# Altium PCB DP_UART.PcbDoc
Units mil, origin at the board's own origin, x right, y up, seen from the top; angles counter-clockwise.
Board outline 1285 x 620 mil, 2 copper layers (Top Layer, Bottom Layer); 14 components, 15 nets, 55 pads, 0 vias.
Unrouted connection lines stored in the file: 28.
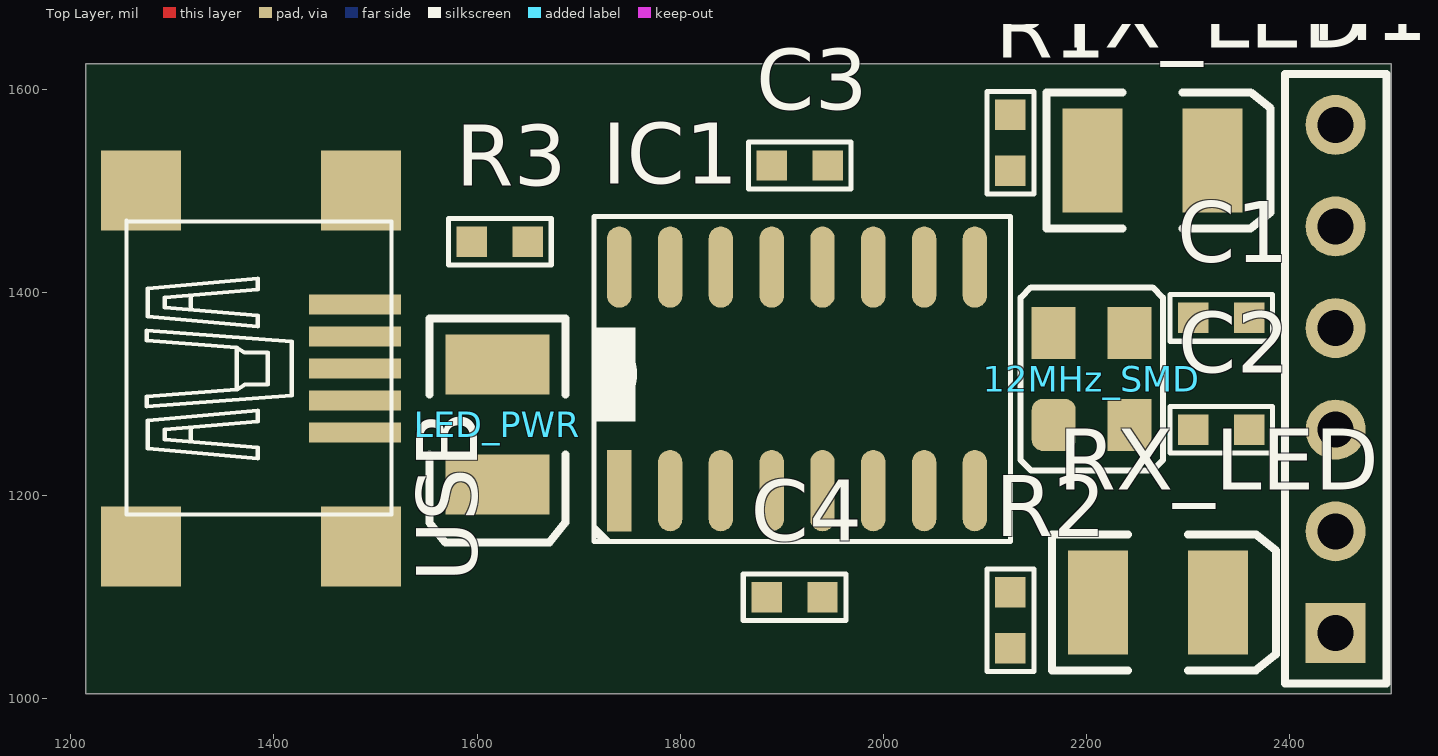
[diagram p0: Top Layer view]
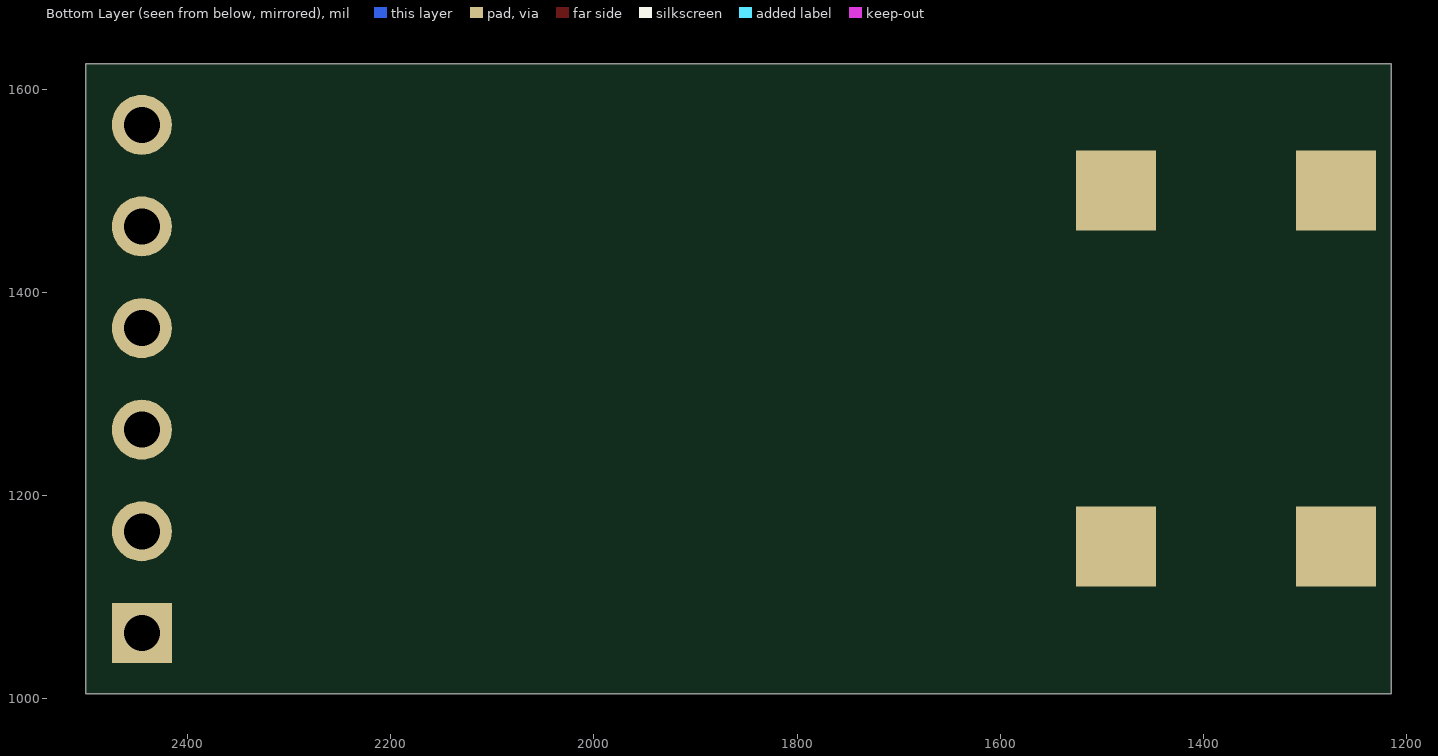
[diagram p1: Bottom Layer view, seen from below]

## Layer stack, top to bottom
Top Solder: solder mask 0.4, Solder Resist, Dk 3.5
Top Layer: signal copper 1.4
Dielectric 1: dielectric 12.6, FR-4, Dk 4.8
Bottom Layer: signal copper 1.4
Bottom Solder: solder mask 0.4, Solder Resist, Dk 3.5

## Board outline
1215,1005 1215,1215 1215,1625 2480,1625 2500,1625 2500,1605 2500,1005

## Design rules (kind name [scope] priority, off if disabled: settings)
Clearance [All] p1: gap=10
PolygonConnect [All] p1: connectstyle=Relief reliefconductorwidth=10 reliefentries=4 polygonreliefangle="90 Angle" airgapwidth=10
RoutingVias [All] p1: holewidth=28 width=50 viastyle="Through Hole" minholewidth=28 minwidth=50 maxholewidth=28 maxwidth=50
SolderMaskExpansion [All] p1: expansion=4
Width [All] p1: maxlimit=10 minlimit=10 preferedwidth=10
30 further rules are at their usual default settings.

## Components (designator, comment, footprint, x,y, rotation, side; value= is the part's Value field where it differs from the comment)
12MHz_SMD "3225" "XTAL 3225" 2205,1315 r90 top
C1 "22pF" 0603C-GENERIC 2360,1375 r180 top
C2 "22pF" 0603C-GENERIC 2360,1265 r180 top
C3 "100nF" 0603C-GENERIC 1890,1525 r0 top
C4 "10nF" 0603C-GENERIC 1885,1100 r0 top
H1 "Header 6" HDR1X6 2445,1065 r90 top
IC1 "CH340G" SO16 1740,1205 r90 top
LED_PWR "LED3" 3.5X2.8X1.9 1620,1270 r270 top
R1 "0603R-1K5" 0603R-1k5 2125,1520 r90 top
R2 "0603R-1K5" 0603R-1k5 2125,1105 r270 top
R3 "0603R-1K5" 0603R-1k5 1650,1450 r180 top
RX_LED "LED3" 3.5X2.8X1.9 2270,1095 r0 top
TX_LED "LED3" 3.5X2.8X1.9 2265,1530 r0 top
USB "USB-B-MINI" USB-MINI-B 1480,1325 r0 top

## Footprints (in the part's own frame and the unit in brackets; to place one, negate y for a bottom-side part, rotate by r counter-clockwise, add the part's x,y. Pads: shape width x height; smd on the part's side, far side on the other; paste and mask are expansions set on the pad)
3.5X2.8X1.9 [mm] "SM LED; 2 C-Bend Leads; Body 3.5 x 2.8 x 1.9 mm, inc leads (LxWxH typ)"
  rect 1.5x2.6 smd: 1(-1.5,0) 2(1.5,0)
  silkscreen extent -2.65,-1.7 2.95,1.7
0603C-GENERIC [mil] "CAPACITOR 0603"
  rect 30x30 smd: 1(0,0) 2(55,0)
  silkscreen extent -23,-23 78,23, body extent -4,-15 59,15, height 19
0603R-1k5 [mil] "RESISTOR 0603"
  rect 30x30 smd: 1(0,0) 2(55,0)
  silkscreen extent -23,-23 78,23, body extent -4,-15 59,15, height 20
HDR1X6 [mm] "Connector; Header; 6 Position"
  rect 1.5x1.5 hole 0.9: 1(0,0)
  round 1.5 hole 0.9: 2(2.54,0) 3(5.08,0) 4(7.62,0) 5(10.16,0) 6(12.7,0)
  silkscreen extent -1.27,-1.27 13.97,1.27
SO16 [mil]
  rect 80x24 smd: 1(0,0)
  oval 80x24 smd: 2(0,-50) 3(0,-100) 4(0,-150) 5(0,-200) 6(0,-250) 7(0,-300) 8(0,-350) 9(220,-350) 10(220,-300) 11(220,-250) 12(220,-200) 13(220,-150) 14(220,-100) 15(220,-50) 16(220,0)
  silkscreen extent -50,-385 270,25, body extent -20,-385 240,25, height 61
USB-MINI-B [mm]
  rect 2.3x0.5 smd: 1(0,1.6) 2(0,0.8) 3(0,0) 4(0,-0.8) 5(0,-1.6)
  rect 2x2 all layers, no hole: M1(-5.35,4.45) M2(0.15,4.45) M3(-5.35,-4.45) M4(0.15,-4.45)
  silkscreen extent -5.72,-3.65 0.91,3.7, body extent -5.73,-3.93 0.96,3.77, height 4.21
"XTAL 3225" [mm] "3225 Quartz"
  rrect50% 1.3x1.1 smd: 1(-1.15,0.95)
  rect 1.3x1.1 smd: 2(1.15,0.95) 3(1.15,-0.95) 4(-1.15,-0.95)
  silkscreen extent -2.29,-1.78 2.29,1.78, body extent -2.4,-1.6 2.6,1.6, height 1

## Part data
12MHz_SMD: library part "3225 Quartz"
C1 C2: library part Passives_Capacitors_0603_22PF-50V-C0G-PAN, "CAPACITOR 0603 CERAMIC"
C3: library part Passives_Capacitors_0603_100NF-25V-X7R-TDK, "CAPACITOR 0603 CERAMIC"
C4: library part Passives_Capacitors_0603_10NF-50V-X7R-MUR, "CAPACITOR 0603 CERAMIC"
H1: "Header, 6-Pin"
LED_PWR RX_LED TX_LED: "Typical BLUE SiC LED"
R1 R2 R3: "GENERIC RESISTOR 0603"
USB: library part Connector_USB_THT_USB-B-MINI, "MINI USB B DEVICE CONNECTOR"

## Nets (pads, with @x,y where several pads share a name; then routed paths per layer and width w, separated by ;. In a path a pad name is that pad's centre, name@x,y a point inside that pad or via, vN(x,y) a via of type N, cw(c..) or ccw(c..) an arc to the next point about the centre after c; other vN are vias at no path point)
3V3: C4.2 H1.3 IC1.4 R1.1 R2.1
5V0: H1.1 R3.1 USB.1
GND: C1.1 C2.1 C3.1 C4.1 H1.6 IC1.1 LED_PWR.2 USB.5
Net12MHz_SMD_1: 12MHz_SMD.1 C2.2
Net12MHz_SMD_2: 12MHz_SMD.2 IC1.7
Net12MHz_SMD_3: 12MHz_SMD.3 C1.2
Net12MHz_SMD_4: 12MHz_SMD.4 IC1.8
NetH1_4: H1.4 IC1.3 RX_LED.2
NetH1_5: H1.5 IC1.2 TX_LED.2
NetIC1_5: IC1.5 USB.3
NetIC1_6: IC1.6 USB.2
NetLED_PWR_1: LED_PWR.1 R3.2
NetR1_2: R1.2 TX_LED.1
NetR2_2: R2.2 RX_LED.1
VCC: C3.2 H1.2 IC1.16
pads on no net: IC1.9 IC1.10 IC1.11 IC1.12 IC1.13 IC1.14 IC1.15 USB.4 USB.M1 USB.M2 USB.M3 USB.M4